# Altium PCB home_auto.PcbDoc
Units mil, origin at the board's own origin, x right, y up, seen from the top; angles counter-clockwise.
Board outline 3100 x 3100 mil, 4 copper layers (L1 SIG, L2 GND, L3 PW, L4 SIG), stack 35.156 mil thick; 40 components, 50 nets, 176 pads, 75 vias.
Unrouted connection lines stored in the file: 1.
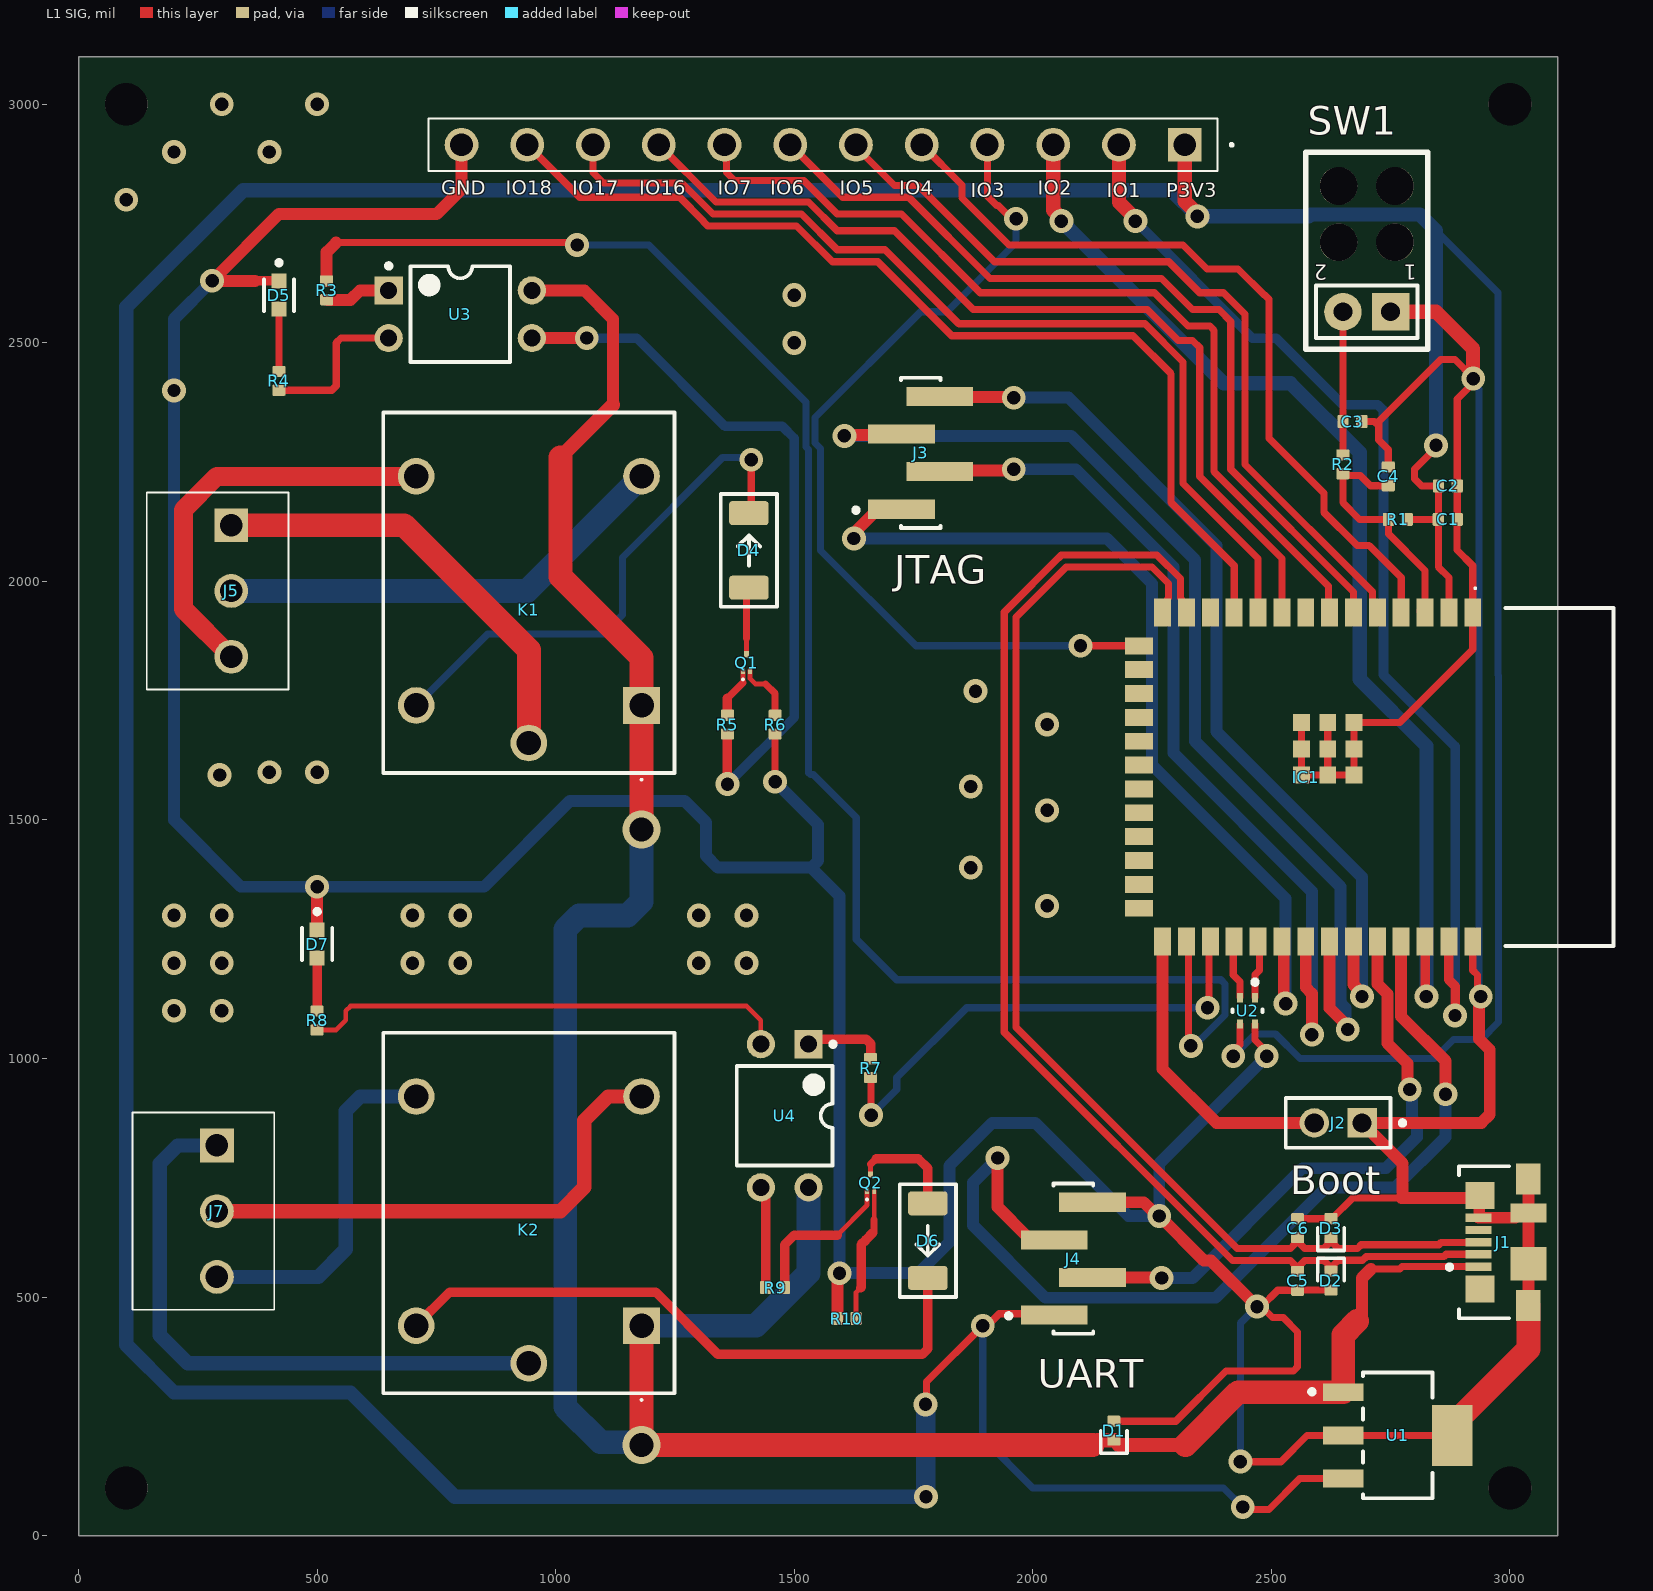
[diagram p0: L1 SIG view]
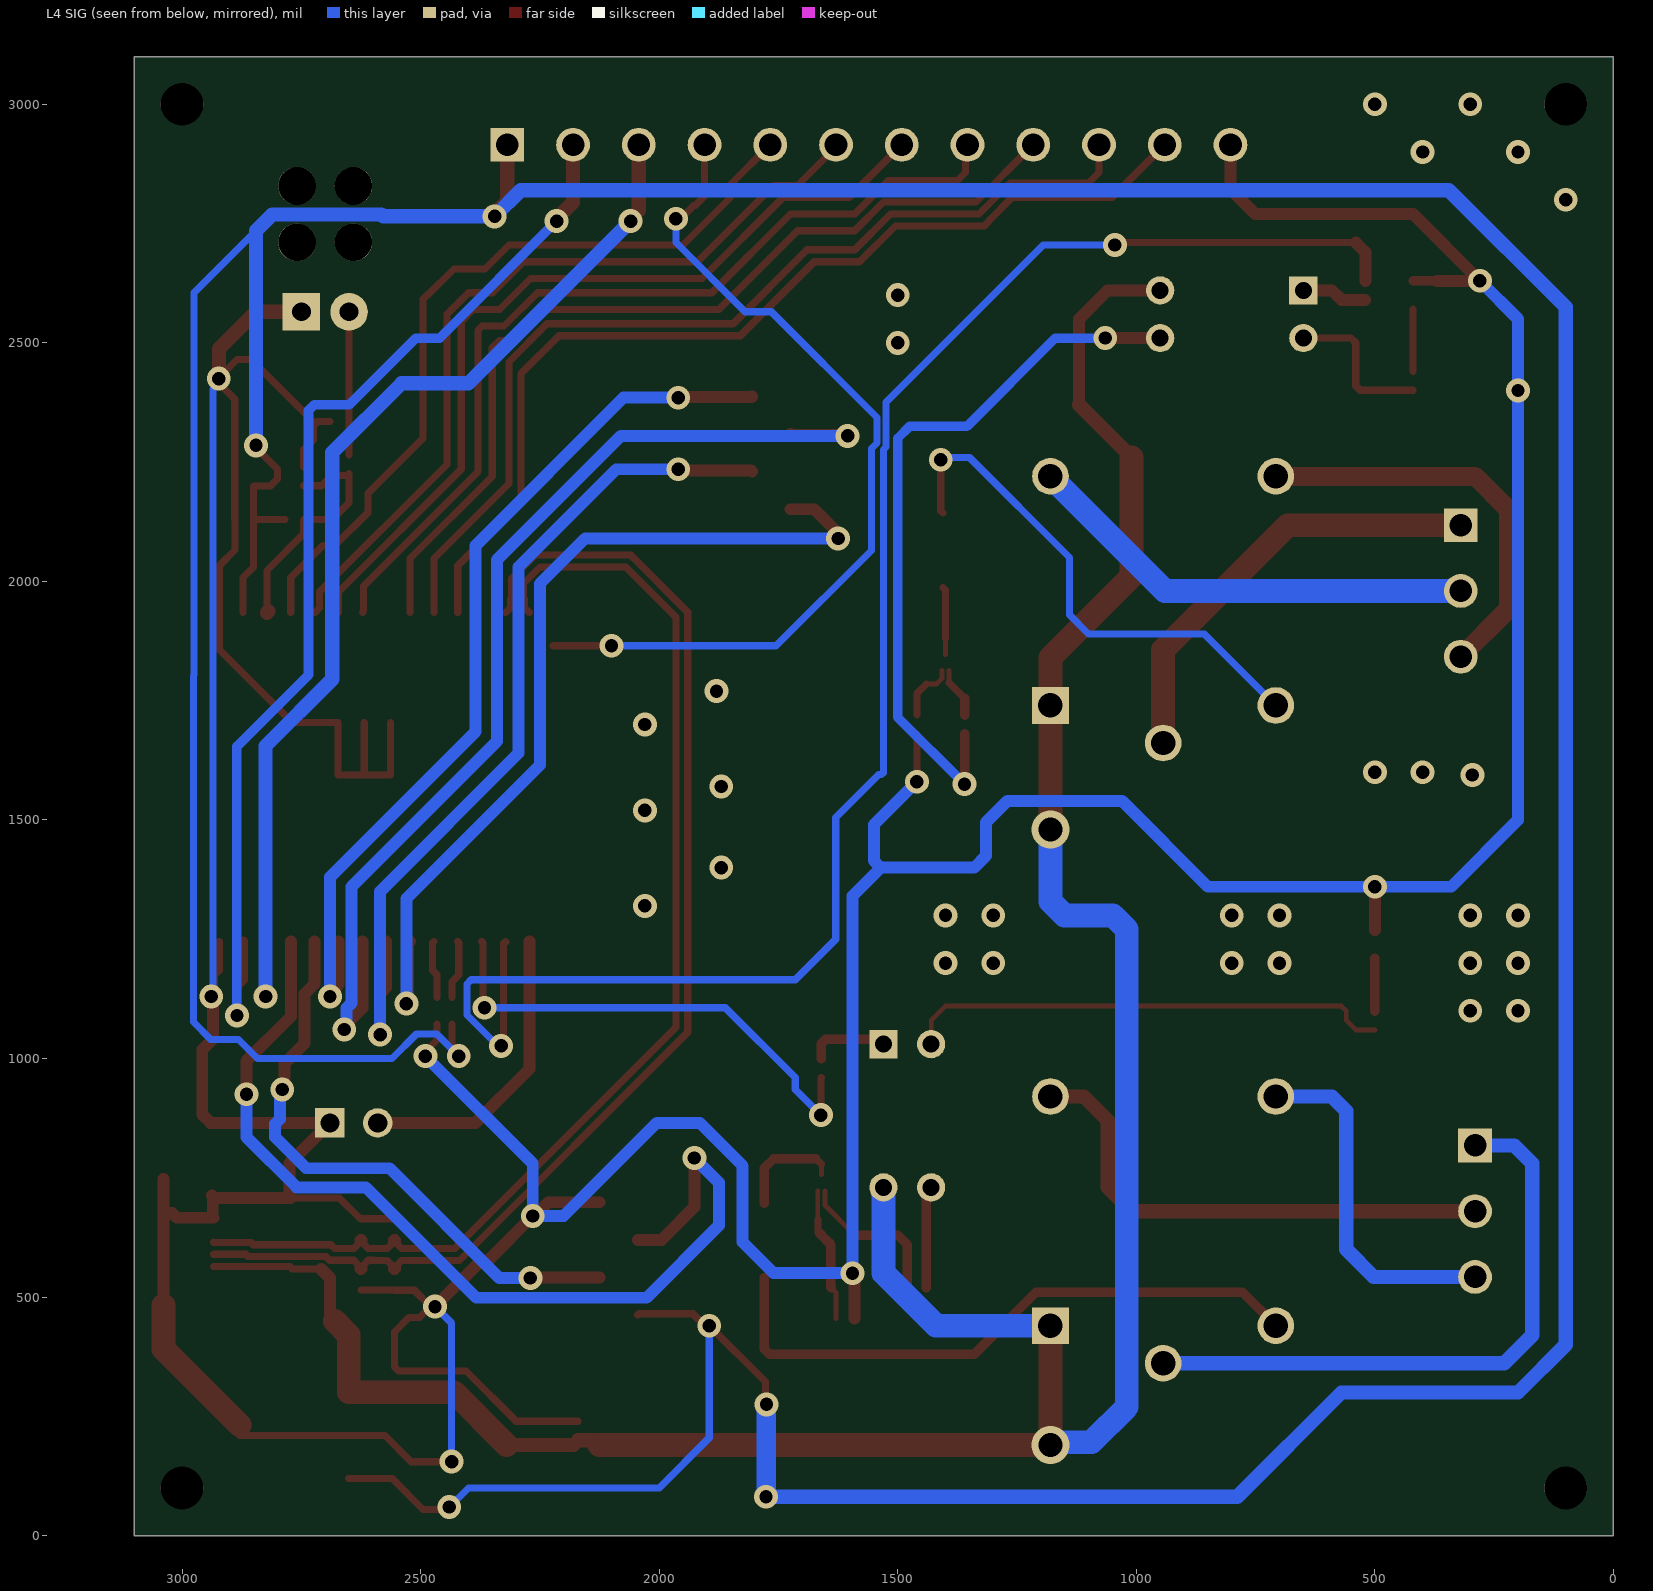
[diagram p1: L4 SIG view, seen from below]
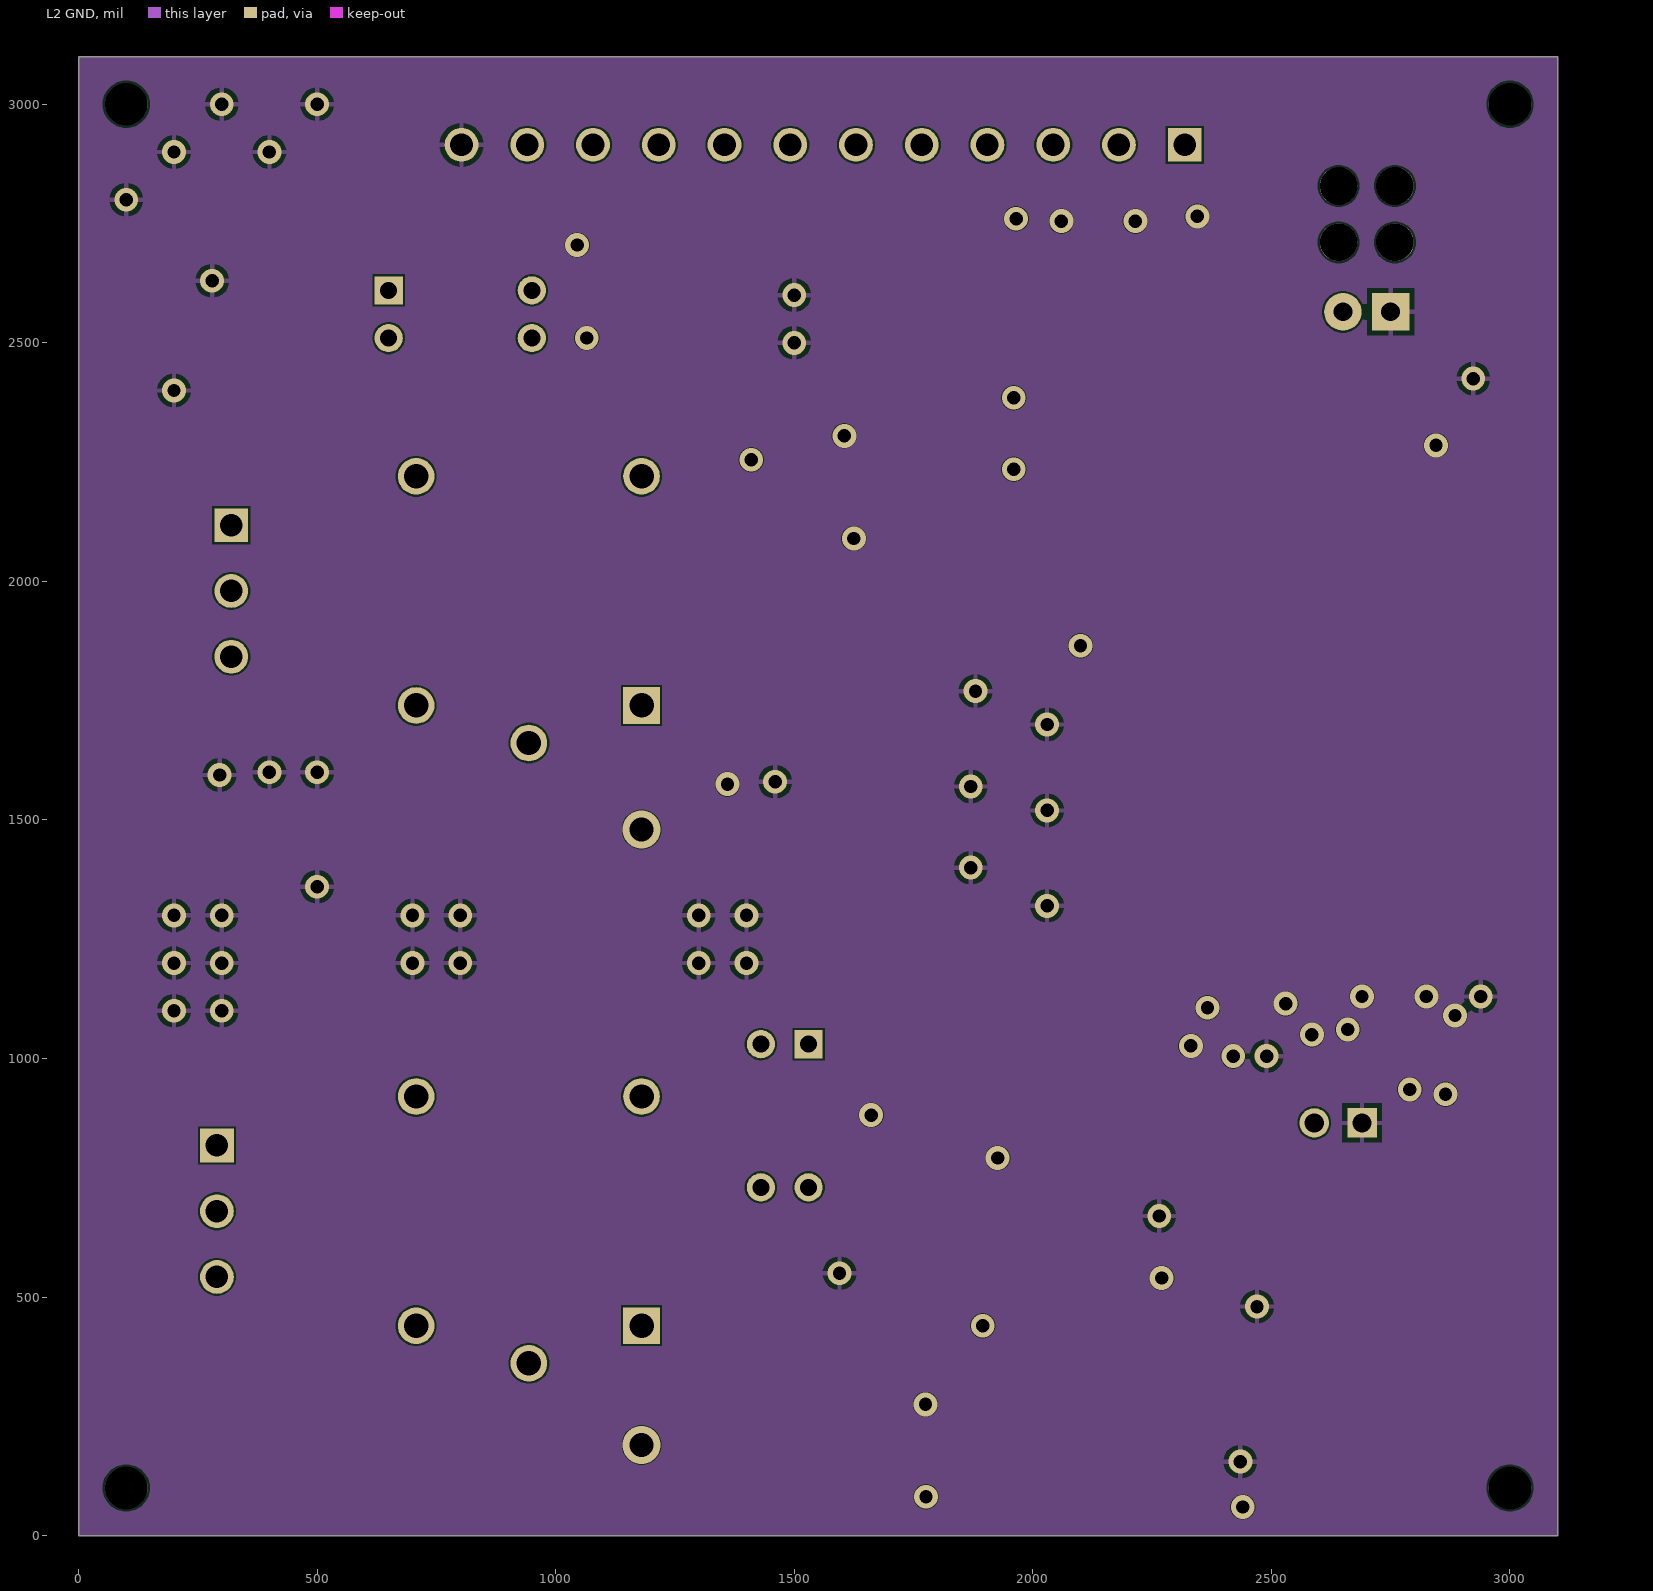
[diagram p2: L2 GND]
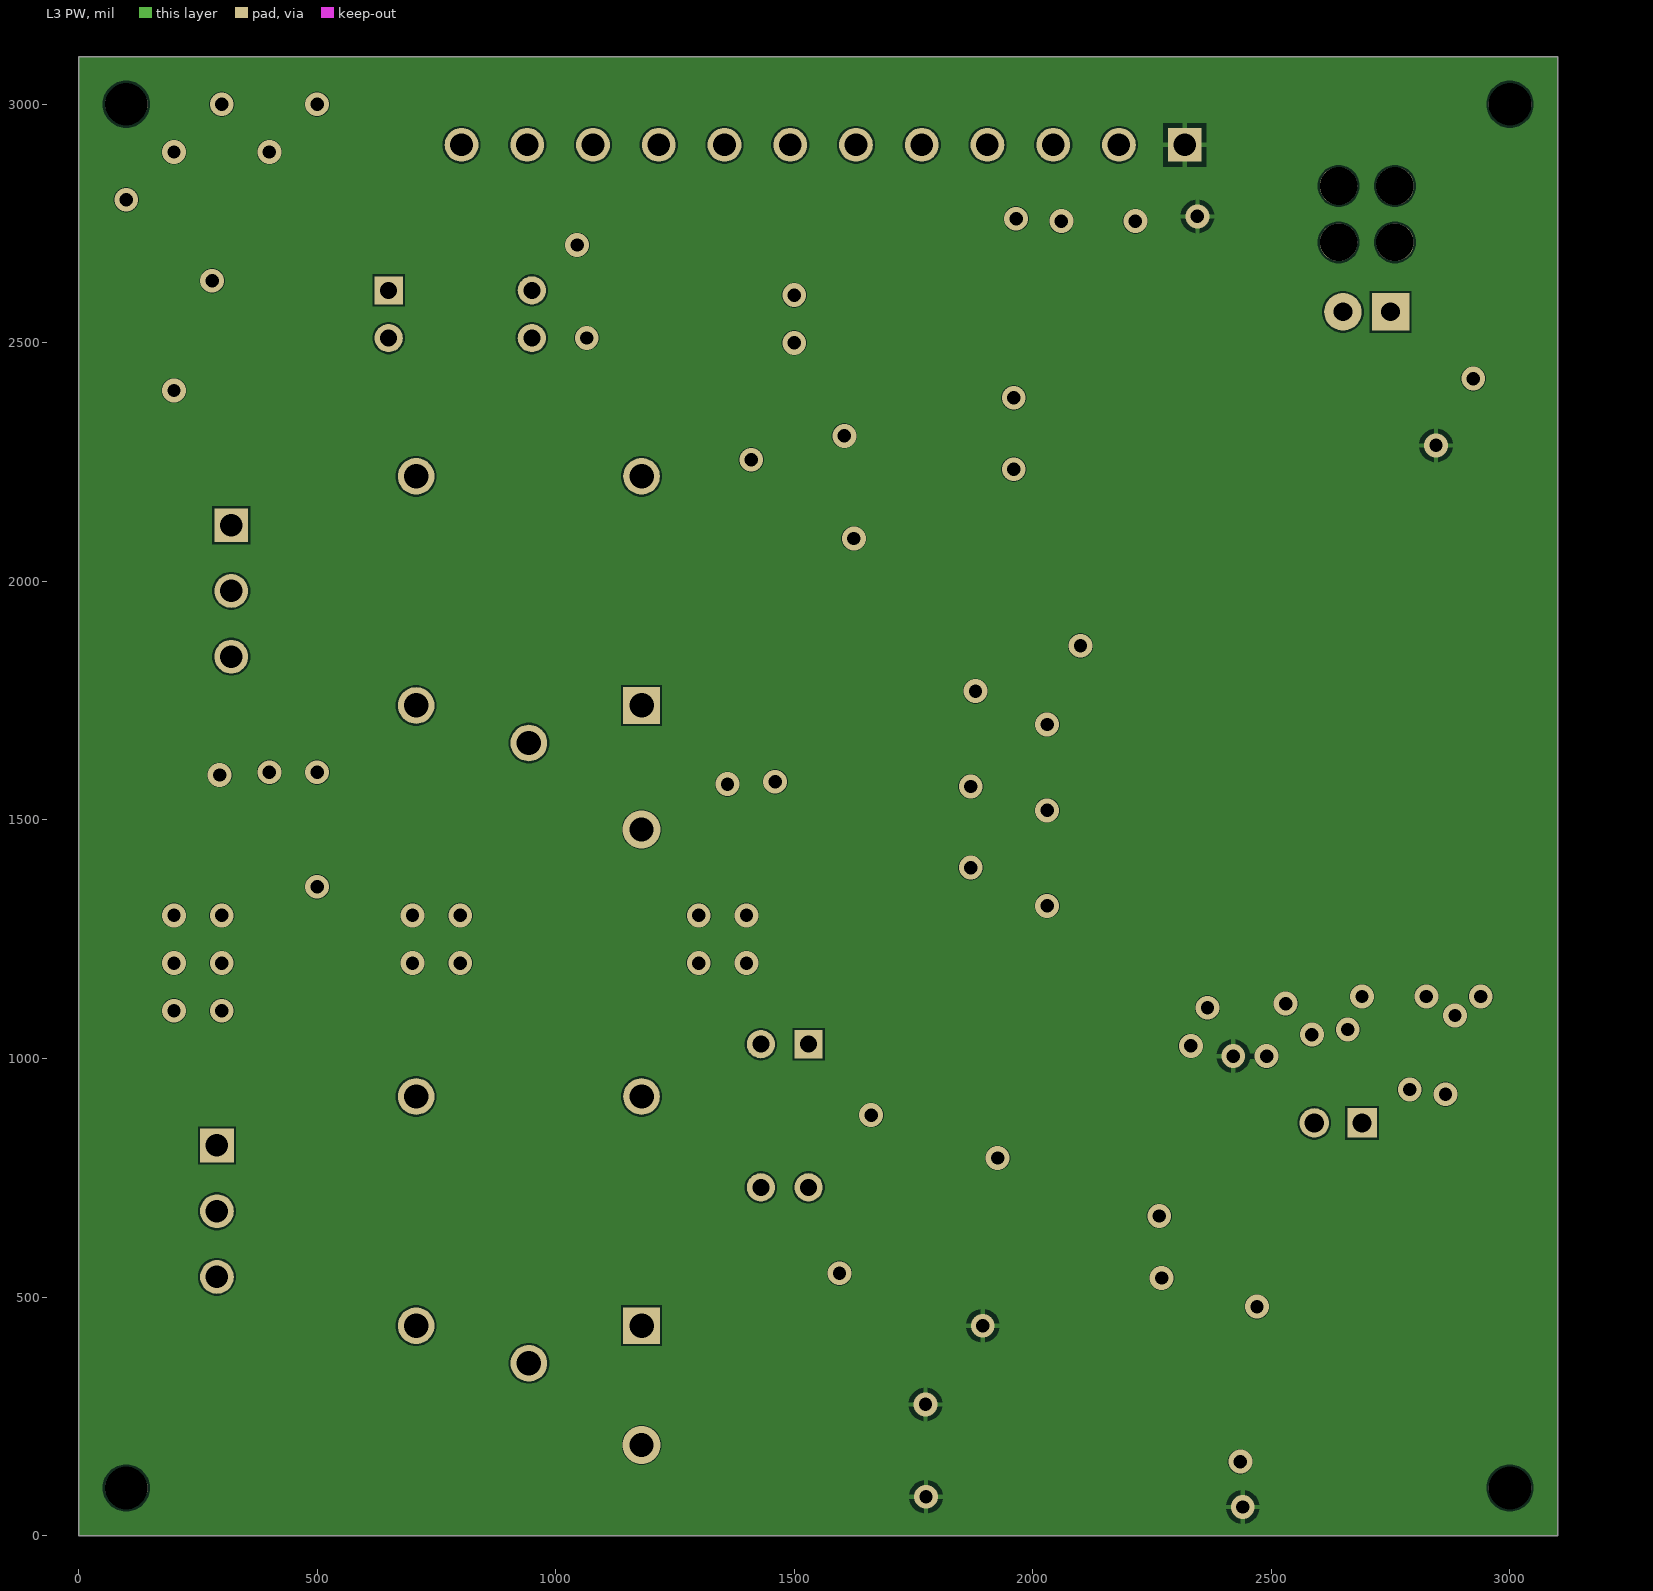
[diagram p3: L3 PW]
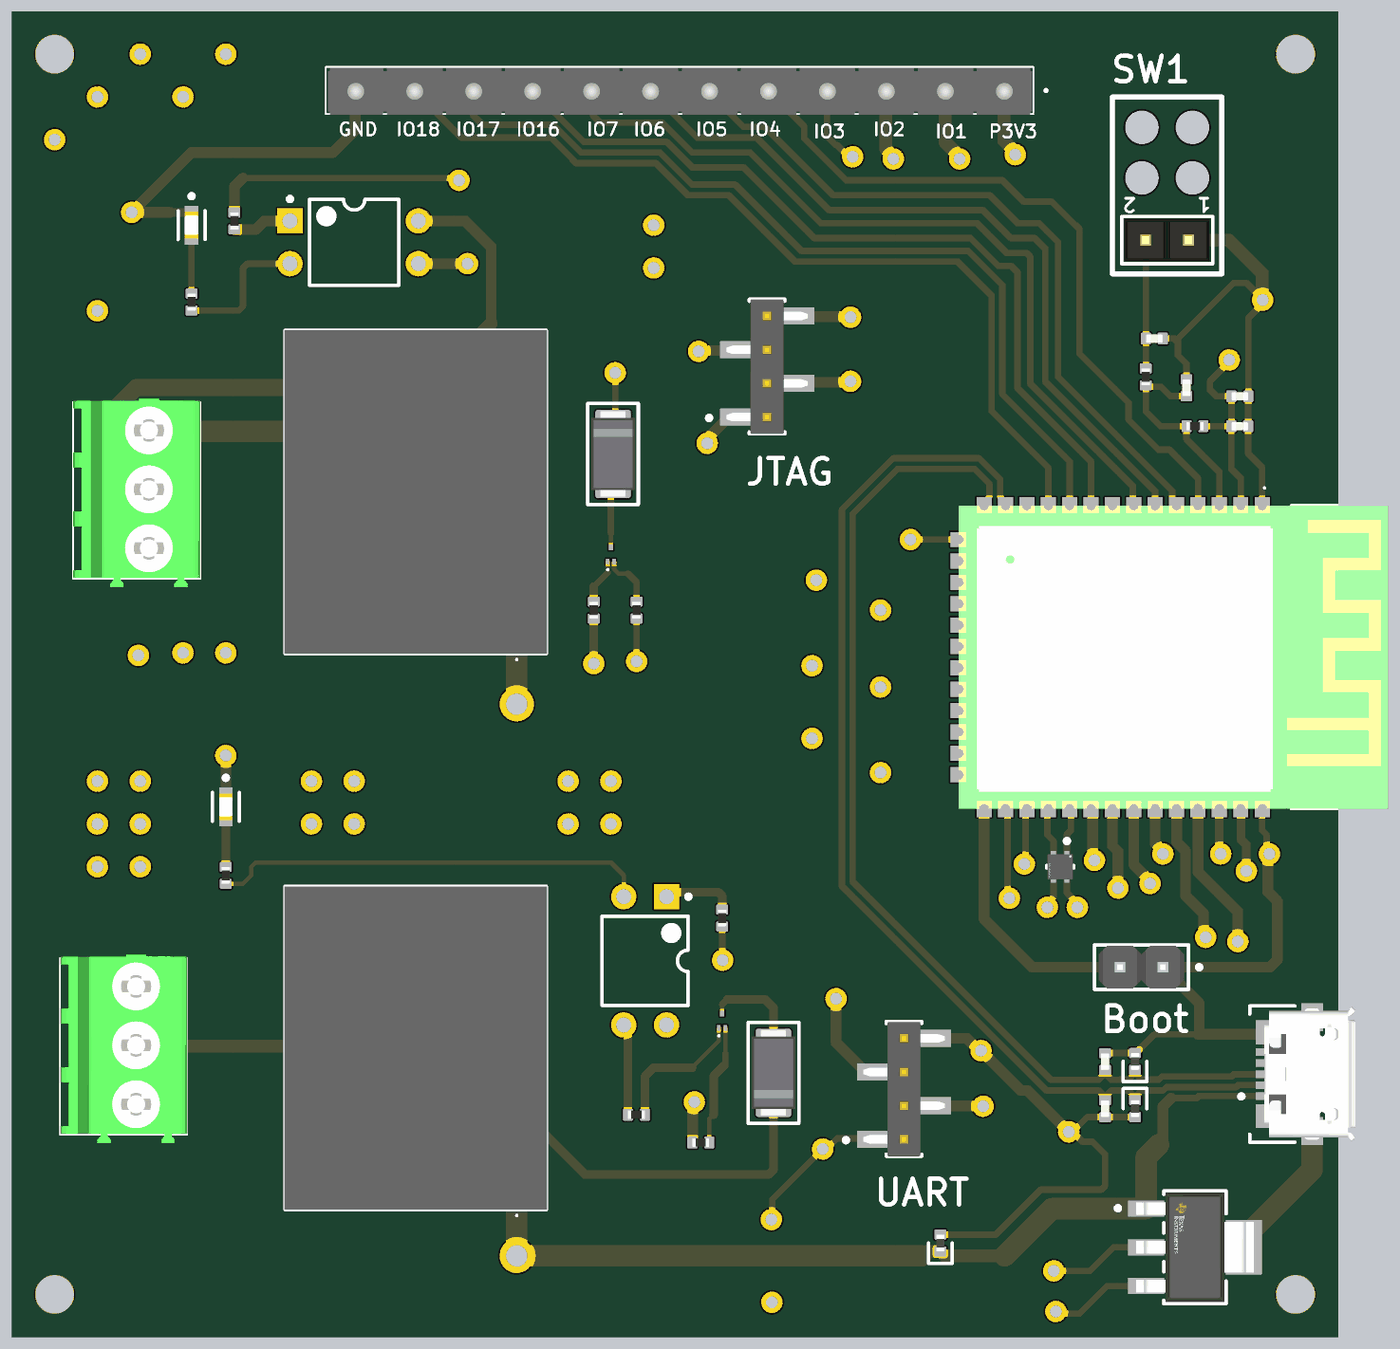
[diagram p4: 3D render of the assembled board from above, using the file's embedded part models]

## Layer stack, top to bottom
Top Solder: solder mask 0.4, Solder Resist, Dk 4
L1 SIG: signal copper 1.378
Dielectric 2: prepreg 2.8, PP-006, Dk 4.6
L2 GND: signal copper 1.4
Dielectric 1: core 24, Core-038, Dk 4.6
L3 PW: signal copper 1.4
Dielectric 3: prepreg 2.8, PP-006, Dk 4.6
L4 SIG: signal copper 1.378
Bottom Solder: solder mask 0.4, Solder Resist, Dk 4

## Board outline
0,0 0,3100 3100,3100 3100,0

## Design rules (kind name [scope] priority, off if disabled: settings)
Clearance [All] p1: gap=4 ignorepadtopadclearanceinfootprint=TRUE except(1: Via-Via Via-Fill Via-Poly Via-Region Via-Text Via-Hole)
DiffPairsRouting [InDifferentialPair('DATA')] p1: maxlimit=10 minlimit=10 mostfreqgap=10 toplayer_minwidth=15 toplayer_maxwidth=15 toplayer_prefwidth=15 midlayer1_minwidth=15 midlayer1_maxwidth=15 midlayer1_prefwidth=15 midlayer2_minwidth=15 midlayer2_maxwidth=15 midlayer2_prefwidth=15 bottomlayer_minwidth=15 bottomlayer_maxwidth=15 bottomlayer_prefwidth=15 maxuncoupledlength=500
PolygonConnect [All] p1: connectstyle=Relief reliefconductorwidth=10 reliefentries=4 polygonreliefangle="90 Angle" airgapwidth=10
RoutingVias [All] p1: holewidth=28 width=50 viastyle="Through Hole" minholewidth=5 minwidth=10 maxholewidth=30 maxwidth=80
SolderMaskExpansion [All] p1: expansion=4 istentingtop=FALSE
SupplyNets "Schematic Supply Nets_2" [InNet('VBUS')] p1: voltage=0.000
SupplyNets "Schematic Supply Nets_1" [InNet('GND')] p2: voltage=0.000
SupplyNets "Schematic Supply Nets" [InNet('P3V3')] p3: voltage=0.000
Width [All] p1: maxlimit=90 minlimit=10 preferedwidth=10
29 further rules are at their usual default settings.

## Classes and differential pairs
differential pair DATA: +DATA_P -DATA_N

## Components (designator, comment, footprint, x,y, rotation, side; value= is the part's Value field where it differs from the comment)
C1 "22u" CAP_0402 2869.69,2130 r180 top
C2 "1u" CAP_0402 2870,2200 r180 top
C3 "1u" CAP_0402 2670,2335 r0 top
C4 "1u" CAP_0402 2745,2220 r90 top
C5 "1u" CAP_0402 2555,534.06 r90 top
C6 "1u" CAP_0402 2555,644.37 r270 top
D1 "" D_0402 2170,220 r270 top
D2 "" D_0402 2625,534.37 r90 top
D3 "" D_0402 2625,644.69 r270 top
D4 "D_SMA" "DO-214AC-2 (SMA)" 1405,2065 r90 top
D5 "LTST-C193TBKT-5A" FP-LTST-C193TBKT-5A-MFG 420,2600 r270 top
D6 "D_SMA" "DO-214AC-2 (SMA)" 1780,618.15 r270 top
D7 "LTST-C193TBKT-5A" FP-LTST-C193TBKT-5A-MFG 500,1240 r270 top
IC1 "ESP32-S3-WROOM-1-N8" ESP32S3WROOM1N8R2 2715,1590 r270 top
J1 "473460001" FP-473460001-MFG 3025,615 r90 top
J2 "Boot" FP-M20-9990246-MFG 2640,865 r180 top
J3 "JTAG" FP-TMM-104-06-L-S-SM-MFG 1765,2269.37 r90 top
J4 "UART" FP-TMM-104-06-L-S-SM-MFG 2085,580.63 r90 top
J5 "1984620" 1984620 320,2117.8 r270 top
J6 "1945193" 1945193 2318.39,2915 r180 top
J7 "1984620" 1984620 290,817.8 r270 top
K1 "SRD-05VDC-SL-C" SRD05VDCSLC 1180,1740 r90 top
K2 "SRD-05VDC-SL-C" SRD05VDCSLC 1180,440 r90 top
Q1 "NST847BF3T5G" ONSC-SOT-1123-3-524AA_V 1400,1830 r90 top
Q2 "NST847BF3T5G" ONSC-SOT-1123-3-524AA_V 1660,740 r90 top
R1 "10K" RES_0402 2765,2130 r180 top
R2 "10K" RES_0402 2650,2245.32 r270 top
R3 "1K" RES_0402 520,2610 r270 top
R4 "R0402" RES_0402 420,2420.32 r270 top
R5 "2K2" RES_0402 1360,1700 r90 top
R6 "1K" RES_0402 1460,1700 r90 top
R7 "1K" RES_0402 1660,980 r90 top
R8 "R0402" RES_0402 500,1079.69 r270 top
R9 "2K2" RES_0402 1459.68,520 r0 top
R10 "1K" RES_0402 1610,455 r0 top
SW1 "FOOTSWITCH_MOM" FOOTSWITCH_MOM 2700,2565 r180 top
U1 "LM3940IMPX-3.3/NOPB" FP-DCY0004A-MFG 2765,210 r0 top
U2 "SHT45-AD1B-R2" FP-SHT45-AD1B-R2-MFG 2450,1100 r270 top
U3 "LTV-817" LTST-LTV-817-4 800,2560 r0 top
U4 "LTV-817" LTST-LTV-817-4 1480,880 r270 top

## Footprints (in the part's own frame and the unit in brackets; to place one, negate y for a bottom-side part, rotate by r counter-clockwise, add the part's x,y. Pads: shape width x height; smd on the part's side, far side on the other; paste and mask are expansions set on the pad)
1945193 [mm]
  rect 1.8x1.8 hole 1.2: 1(0,0)
  round 1.8 hole 1.2: 2(3.5,0) 3(7,0) 4(10.5,0) 5(14,0) 6(17.5,0) 7(21,0) 8(24.5,0) 9(28,0) 10(31.5,0) 11(35,0) 12(38.5,0)
  silkscreen extent -2.55,-1.4 40.25,1.4, body extent -1.68,-1.35 40.12,1.45, height 9.56
1984620 [mm]
  rect 1.8x1.8 hole 1.2: 1(0,0)
  round 1.8 hole 1.2: 2(3.5,0) 3(7,0)
  silkscreen extent -1.75,-4.5 8.75,3.05, body extent -1.94,-4.49 9.26,3.06, height 9.15
CAP_0402 [mm]
  rrect25% 0.6x0.7 smd: 1(-0.5,0) 2(0.5,0)
  body extent -0.5,-0.26 0.5,0.26, height 0.37
D_0402 [mm]
  rrect25% 0.6x0.7 smd: A(-0.5,0) K(0.5,0)
  silkscreen extent 0,-0.7 1.2,0.7, body extent -0.5,-0.25 0.5,0.25, height 0.51
"DO-214AC-2 (SMA)" [mm]
  rrect25% 1.27x2.1 smd: A(-1.985,0) K(1.985,0)
  silkscreen extent -3,-1.5 3,1.5, body extent -2.6,-1.3 2.6,1.3, height 2.42
ESP32S3WROOM1N8R2 [mm]
  rect 1.5x0.9 smd: 1(-8.75,5.26) 2(-8.75,3.99) 3(-8.75,2.72) 4(-8.75,1.45) 5(-8.75,0.18) 6(-8.75,-1.09) 7(-8.75,-2.36) 8(-8.75,-3.63) 9(-8.75,-4.9) 10(-8.75,-6.17) 11(-8.75,-7.44) 12(-8.75,-8.71) 13(-8.75,-9.98) 14(-8.75,-11.25) 27(8.75,-11.25) 28(8.75,-9.98) 29(8.75,-8.71) 30(8.75,-7.44) 31(8.75,-6.17) 32(8.75,-4.9) 33(8.75,-3.63) 34(8.75,-2.36) 35(8.75,-1.09) 36(8.75,0.18) 37(8.75,1.45) 38(8.75,2.72) 39(8.75,3.99) 40(8.75,5.26)
  rect 0.9x1.5 smd: 15(-6.985,-12.5) 16(-5.715,-12.5) 17(-4.445,-12.5) 18(-3.175,-12.5) 19(-1.905,-12.5) 20(-0.635,-12.5) 21(0.635,-12.5) 22(1.905,-12.5) 23(3.175,-12.5) 24(4.445,-12.5) 25(5.715,-12.5) 26(6.985,-12.5)
  rect 0.9x0.9 smd: 41(-1.5,-2.46) 42(-1.5,-1.06) 43(-2.9,-1.06) 44(-2.9,-2.46) 45(-2.9,-3.86) 46(-1.5,-3.86) 47(-0.1,-3.86) 48(-0.1,-2.46) 49(-0.1,-1.06)
  silkscreen extent -10.1,5.35 9,12.75, body extent -9,-12.75 9,12.75, height 2.7
FOOTSWITCH_MOM [mm]
  rect 2x2 hole 1 mask+0.1: 1(-1.27,0)
  round 2 hole 1 mask+0.1: 2(1.27,0)
  round 2 hole 2 unplated mask+0.1: SR(-1.5,-3.7) SR(-1.5,-6.7) SR(1.5,-3.7) SR(1.5,-6.7)
  silkscreen extent -3.25,-8.5 3.25,2, body extent -2.53,-1.27 2.55,1.27, height 8.44
FP-473460001-MFG [mm]
  rect 0.45x1.38 smd paste+0 mask+0: 1(-1.3,2.31) 2(-0.65,2.31) 3(0,2.31) 4(0.65,2.31) 5(1.3,2.31)
  rect 1.425x1.55 smd paste+0 mask+0: 6(-2.488,2.225) 7(2.488,2.225)
  rect 1.65x1.3 smd paste+0 mask+0: 8(-3.375,-0.35) 11(3.375,-0.35)
  rect 1.8x1.9 smd paste+0 mask+0: 9(-1.15,-0.35)
  rect 1x1.9 smd paste+0 mask+0: 10(1.55,-0.35)
  silkscreen extent -4.05,0.67 4.05,3.97, body extent -4.3,-2.48 4.3,3.45, height 0.25
FP-DCY0004A-MFG [mm]
  rect 2.15x0.95 smd paste+0 mask+0: 1(-2.9,2.3) 2(-2.9,0) 3(-2.9,-2.3)
  rect 2.15x3.25 smd paste+0 mask+0: 4(2.9,0)
  silkscreen extent -4.7,-3.35 1.85,3.35, body extent -4.08,-3.45 4.08,3.45, height 0.25
FP-LTST-C193TBKT-5A-MFG [mm]
  rect 0.8x0.8 smd paste+0 mask+0: 1(-0.75,0) 2(0.75,0)
  silkscreen extent -1.85,-0.8 0.85,0.8, body extent -1.25,-0.55 1.25,0.55, height 0.25
FP-M20-9990246-MFG [mm]
  rect 1.57x1.57 hole 1.02 paste-2539.97 mask+0: 1(-1.27,0)
  round 1.57 hole 1.02 paste-2539.97 mask+0: 2(1.27,0)
  silkscreen extent -3.55,-1.32 2.79,1.32, body extent -2.89,-1.42 2.89,1.42, height 0.25
FP-SHT45-AD1B-R2-MFG [mm]
  rect 0.5x0.3 smd paste+0 mask+0: 1(-0.7,0.4) 2(-0.7,-0.4) 3(0.7,-0.4) 4(0.7,0.4)
  silkscreen extent -1.65,-0.8 0.08,0.8, body extent -1.05,-0.9 1.05,0.9, height 0.25
FP-TMM-104-06-L-S-SM-MFG [mil]
  rect 40x140 smd paste+0 mask+0: 1(-118.11,40) 2(-39.37,-40) 3(39.37,40) 4(118.11,-40)
  silkscreen extent -157,-42 157,140, body extent -161,-114 161,114, height 10
LTST-LTV-817-4 [mm] "DIP, 4-Leads, Body 7x5.1mm, Pitch 2.54mm"
  rect 1.5x1.5 hole 0.9: 1(-3.81,1.27)
  round 1.5 hole 0.9: 2(-3.81,-1.27) 3(3.81,-1.27) 4(3.81,1.27)
  silkscreen extent -3.93,-2.55 2.65,2.69, body extent -3.95,-2.55 3.95,2.55, height 4.5
ONSC-SOT-1123-3-524AA_V [mm] "SOT223, 3-Leads, Body 0.8x0.6mm, Pitch 0.38mm"
  rect 0.34x0.2 smd: 1(-0.43,0.19) 2(-0.43,-0.19)
  rect 0.34x0.26 smd: 3(0.43,0)
  silkscreen extent -0.95,0.14 -0.85,0.24, body extent -0.4,-0.3 0.4,0.3, height 0.4
RES_0402 [mm]
  rrect25% 0.6x0.7 smd: 1(-0.5,0) 2(0.5,0)
  body extent -0.5,-0.25 0.5,0.25, height 0.3
SRD05VDCSLC [mm]
  rect 1.95x1.95 hole 1.3: 1(0,0)
  round 1.95 hole 1.3: 2(12.2,0) 3(12.2,12) 4(0,12) 5(-2,6)
  silkscreen extent -4,-1.75 15.6,13.75, body extent -3.6,-1.8 15.6,13.8, height 15.9

## Part data
C1 C2 C3 C4 C5 C6: library part CAP_0402, "Capacitor SMD 0402"
D1 D2 D3: library part D_TVS_0402, "Diode TVS / ESD 0402"
D4 D6: "Diode SMD SMA (DO-214AA)"
D5 D7: library part CMP-2000-06624-2, "LED BLUE CLEAR CHIP SMD", Case Code (Imperial)=0603, Case Code (Metric)=1608, Color=Blue, Forward Current=20mA, Forward Voltage=2.8V, Lens Color=Colorless, Max Operating Temperature=80°C, Min Operating Temperature=-20°C, Package Quantity=1, Power Dissipation=76mW, Reverse Voltage=5V, Test Current=5mA, Case/Package=0603, Depth=0.8mm, Dominant Wavelength=475nm, Height=0.35mm, Illumination Color=Blue, Lead Free="Lead Free", Length=1.6mm, Lens Style=Diffused, Lens Transparency=Clear, Luminous Intensity=15mcd, Mount="Surface Mount", Number of Elements=1, Number of LEDs=1, Number of Pins=2, Packaging="Tape and Reel", Radiation Hardening=No, RoHS Compliant=Yes, Viewing Angle=130°, Width=0.8mm
IC1: "Integrated Circuit", Manufacturer_Name="Espressif Systems", Mouser Part Number=356-ESP32-S3WROOM1N8, Datasheet Link=https://www.espressif.com/sites/default/files/documentation/esp32-s3-wroom-1_wroom-1u_datasheet_en.pdf, Height=3.25mm, Manufacturer_Part_Number=ESP32-S3-WROOM-1-N8, Mouser Price/Stock=https://www.mouser.co.uk/ProductDetail/Espressif-Systems/ESP32-S3-WROOM-1-N8?qs=Wj%2FVkw3K%252BMC1mq0KGPvoSQ%3D%3D
J1: library part CMP-2000-05246-2, "CONN RCPT USB2.0 MICRO B SMD R/A", Current Rating=1.8A, Manufacturer=Molex, Package=0, Temperature="-30°C to +85°C", Temperature Range High=+85°C, Temperature Range Low=-30°C, Voltage Rating=30V, Automotive=No, Category=Conn, ComponentLink2Description=Datasheet, ComponentLink2URL=https://www.molex.com/webdocs/datasheets/pdf/en-us/0473460001_IO_CONNECTORS.pdf, Conn Orientation="Right Angle", Contact Material=Gold,Nickel, Device Class L1=Connectors, Device Class L2="USB Connectors", Device Class L3=unset, Digikey Description="CONN RCPT USB2.0 MICRO B SMD R/A", Footprint Url=https://www.molex.com/pdm_docs/sd/473460001_sd.pdf, Height=2.945mm, Is Female=yes, Lead Free=Yes, Manufacturer Part Number=473460001, Number of Contacts=5, Octopart=https://octopart.com/47346-0001-molex-7164928, Pitch=0.65mm, RoHS=TRUE, Shielding=true, USB Standard="USB 2.0"
J2: library part CMP-15831-000009-1, "CONN HEADER VERT 2POS 2.54MM", Current Rating=3A, Manufacturer=Harwin, Manufacturer Part Number=M20-9990246, Temperature="-40°C to +105°C", Temperature Range High=+105°C, Temperature Range Low=-40°C, Automotive=No, Category=Conn, ComponentLink2Description=Datasheet, ComponentLink2URL=https://cdn.harwin.com/pdfs/M20-999.pdf, Conn Gender=Male, Conn Orientation=Vertical, Contact Material=Tin,Nickel, Device Class L1=Connectors, Device Class L2="Headers and Wire Housings", Device Class L3=unset, Digikey Description="CONN HEADER VERT 2POS 2.54MM", Height=8.99mm, Lead Free=Yes, Mouser Description="2.54mm (0.1\") Pitch SIL Vertical PC Tail Pin Header, 6.1mm mating pin height, tin, 2 contacts", Number of Contacts=2, Number Of Rows=1, Octopart=https://octopart.com/m20-9990246-harwin-2590635, Package=M20-9990246, Pitch=2.54mm, RoHS=TRUE
J3 J4: library part CMP-02766-001580-1, "2MM TERMINAL STRIP", Flammability Rating="UL94 V-0", Housing Color=Black, Max Current Rating=3.9A, Max Operating Temperature=125°C, Max Voltage Rating (AC)=500V, Min Operating Temperature=-55°C, Connector Type=Header, Contact Finish - Mating=GOLD, Contact Material=Bronze, Contact Plating=Gold, Contact Shape=Square, Contact Type="Male Pin", Depth=1.97mm, Fastening Type=Pull, Gender=Male, Housing Material=Polymer, Insulation Color=Black, Insulation Material=Polymer, Lead Free="Lead Free", Length=8mm, Number of Contacts=4, Number of Positions=4, Number Of Rows=1, Orientation=Straight, Packaging=Rail/Tube, Pitch=2mm, Radiation Hardening=No, RoHS Compliant=Yes, Series=TMM, Termination=Solder
J5 J7: "Connector", Manufacturer_Name="Phoenix Contact", Mouser Part Number=651-1984620, Arrow Part Number=1984620, Arrow Price/Stock=https://www.arrow.com/en/products/1984620/phoenix-contact?utm_currency=USD&region=nac, Datasheet Link=https://datasheet.datasheetarchive.com/originals/distributors/SFDatasheet-2/sf-00059019.pdf, Height=9.3mm, Manufacturer_Part_Number=1984620, Mouser Price/Stock=https://www.mouser.co.uk/ProductDetail/Phoenix-Contact/1984620?qs=qPbxTIUfeZanCGLWbKOtjg%3D%3D
J6: "Connector", Manufacturer_Name="Phoenix Contact", Mouser Part Number=651-1945193, Arrow Part Number=1945193, Arrow Price/Stock=https://www.arrow.com/en/products/1945193/phoenix-contact?region=nac, Datasheet Link=http://www.phoenixcontact.com/de/produkte/1945193/pdf, Height=9.2mm, Manufacturer_Part_Number=1945193, Mouser Price/Stock=https://www.mouser.co.uk/ProductDetail/Phoenix-Contact/1945193?qs=BYlwlsDsB%2Fqar1yaPw8fZg%3D%3D
K1 K2: "Relay or Contactor", Manufacturer_Name=EAGLE, Datasheet Link=http://www.songlerelay.com/Public/Uploads/20161104/581c81ac16e36.pdf, Height=15.8mm, Manufacturer_Part_Number=SRD-05VDC-SL-C
Q1 Q2: library part CMP-1048-00443-1, "NPN General Purpose Transistor, 3-Pin SOT-1123, Pb-Free, Tape and Reel", Manufacturer="On Semiconductor", ComponentLink1Description="Manufacturer URL", ComponentLink1URL=http://www.onsemi.com/, ComponentLink2Description=Datasheet, ComponentLink2URL=http://www.onsemi.com/pub_link/Collateral/NST847BF3-D.PDF, ComponentLink3Description="Package Specification", ComponentLink3URL=http://www.onsemi.cn/pub_link/Collateral/524AA.PDF, DatasheetVersion="Rev. 1", fT Min (MHz)=100, IC Continuous (A)=0.1, Mounting Technology="Surface Mount", PackageDescription="3-Pin Small Outline Transistor, Body 0.8 x 0.6 mm, Pitch 0.375 mm", PackageReference=SOT-1123-3-524AA, PackageVersion="Rev. C, 11/2011", Packing="Tape and Reel", PartNumber=NST847BF3T5G, Polarity=NPN, RoHS=TRUE
R1 R2 R3 R4 R5 R6 R7 R8 R9 R10: library part RES_0402, "Resistor SMD 0402"
SW1: "Header 2.54mm THT for Momentary SPST Footswitch"
U1: library part CMP-04917-000180-1, "IC REG LINEAR 3.3V 1A SOT223-4", Case/Package=SOT-223, Dropout Voltage=500mV, Max Input Voltage=7.5V, Max Operating Temperature=125°C, Max Output Current=1A, Min Input Voltage=4.5V, Min Operating Temperature=-40°C, Output Voltage=3.3V, Package Quantity=2000, Quiescent Current=15mA, Contact Plating=Tin, Lead Free="Lead Free", Mount="Surface Mount", Number of Outputs=1, Number of Pins=4, Number of Regulators=1, Output Current=1A, Output Type=Fixed, Packaging="Tape and Reel", Polarity=Positive, Radiation Hardening=No, RoHS Compliant=Yes
U2: library part CMP-144040-000011-1, "SENSOR HUMID/TEMP HIGH ACCURACY"
U3 U4: library part CMP-2000-06632-1, "Photocoupuler, 50 mA Forward Current, 1.2 V Forward Voltage, -50 to 110 degC, 4-Pin DIP, RoHS, Tube", Manufacturer=Lite-On, Maximum Collector Current=50mA, Maximum Collector Emitter Saturation Voltage=200mV, Maximum Collector Emitter Voltage=35V, Maximum Current Transfer Ratio=600%, Maximum Forward Voltage=1.4V, Maximum Operating Temperature=100C, Maximum Power Dissipation=200mW, Maximum Reverse Voltage=6V, Minimum Current Transfer Ratio=50%, Minimum Isolation Voltage=5000Vrms, Minimum Operating Temperature=-30C, Package Description="4-Pin Double In-line Package, Body 6.5 x 4.6 mm, Pitch 2.54 mm", Supplier_Package=PDIP, Typical Forward Voltage=1.2V, Datasheet URL=http://optoelectronics.liteon.com/upload/download/DS70-2012-0050/S_110_LTV-8X7%20series%200915.pdf, Datasheet Version="Rev. E, 10/2015", Family=LTV817, Input Type=DC, Manufacturer URL=http://www.us.liteon.com/, Maximum Fall Time=18us, Maximum Input Current=50mA, Maximum Rise Time=18us, Mounting=ThroughHole, Mounting Technology=ThroughHole, Number of Channels per Chip=1, Output Device=Transistor, Output Type=DC, Package Reference=LTV-817, Pin_Count=4, Product Height=3.5mm, Product Length=4.6mm, Product Type=TransistorandPhotovoltaicOutputPhotoCouplers, Product Width=6.5mm, Typical Fall Time=3us, Typical Rise Time=4us

## Free pads (board coordinates)
  oval 90x60 hole 90: 2(100,100) 2(100,3000) 2(3000,100) 2(3000,3000)

## Via types
v1: diameter 50, hole 28, L1 SIG to L4 SIG, 73 vias
v2: diameter 80, hole 50, L1 SIG to L4 SIG, 2 vias

## Nets (pads, with @x,y where several pads share a name; then routed paths per layer and width w, separated by ;. In a path a pad name is that pad's centre, name@x,y a point inside that pad or via, vN(x,y) a via of type N, cw(c..) or ccw(c..) an arc to the next point about the centre after c; other vN are vias at no path point)
COM1: J5.1 K1.5 | length 927.1
  L1 SIG w50: J5.1 682.2,2117.8 943.78,1856.22 K1.5
COM2: J7.1 K2.5 | length 1293.8
  L4 SIG w30: J7.1 207.8,817.8 170,780 170,420 228.74,361.26 K2.5
DATA_N: C5.2 D2.K IC1.13 J1.2 | length 2655.2
  L1 SIG w15: IC1.13 2311.87,1944.7 2311.87,1963.02 2309.59,1965.3 2309.59,2005.77 2260.36,2055 2059.64,2055 2045,2040.36 1954.64,1950 1940,1935.36 1940,1055 1954.64,1040.36 2403.64,591.36 2418.29,576.71 2539.93,576.71 2548.72,567.93 2548.72,558.05 2553.03,553.74 C5.2 2556.97,553.74 2561.28,558.05 2561.28,567.93 2570.07,576.71 2597.19,576.71 2597.51,577.03 2609.93,577.03 2618.72,568.24 2618.72,558.37 2623.03,554.06 D2.K 2626.97,554.06 2631.28,558.37 2631.28,568.24 2640.07,577.03 2691.04,577.03 2698.72,584.7 2861.26,584.7 2866.26,589.7 2933.76,589.7 J1.2
DATA_P: C6.2 D3.K IC1.14 J1.3 | length 2531
  L1 SIG w15: IC1.14 2282.3,1944.7 2282.3,1963.02 2284.59,1965.3 2284.59,1995.41 2250,2030 2070,2030 1965,1925 1965,1065.36 2428.64,601.71 2539.93,601.71 2548.72,610.5 2548.72,620.37 2553.03,624.68 C6.2 2556.97,624.68 2561.28,620.37 2561.28,610.5 2570.07,601.71 2586.84,601.71 2587.15,602.03 2609.93,602.03 2618.72,610.81 2618.72,620.69 2623.03,625 D3.K 2626.97,625 2631.28,620.69 2631.28,610.81 2640.07,602.03 2680.69,602.03 2688.37,609.7 2850.9,609.7 2855.9,614.7 2933.76,614.7 J1.3
GND: C1.1 C2.1 C3.2 C4.2 C5.1 C6.1 D1.A D2.A D3.A D5.1 D7.1 IC1.1 IC1.40 IC1.41 IC1.42 IC1.43 IC1.44 IC1.45 IC1.46 IC1.47 IC1.48 IC1.49 J1.5 J1.6 J1.7 J1.8 J1.9 J1.10 J1.11 J2.1 J4.4 J6.12 R6.1 R10.1 SW1.1 U1.2 U1.4 U2.4 | length 13774.9
  L1 SIG w10: D5.1@419.53,2630 D5.1
  L1 SIG w15: v1(1460,1580) R6.1 ; D1.A 2299.68,239.68 2405,345 2546.21,345 2555,353.79 2555,426.97 2524.88,457.09 2502.38,457.09 v1@2479.47,480 ; v1(2435,155) 2520,155 2575,210 U1.2 U1.4 U1.4@2879.17,231.65 ; U2.4 2465.75,1038.72 2490,1014.47 v1(2490,1005) ; v1@2479.04,480 2513.41,514.37 C5.1 2555.16,514.53 2624.84,514.53 D2.A ; C6.1 2555.16,664.21 2624.84,664.21 D3.A 2626.97,664.37 2670.53,707.93 2772.4,707.93 ; IC1.45 IC1.46 IC1.47 IC1.48 ; IC1.44 IC1.41 IC1.48 ; C3.2 2716.21,2335 2720.61,2330.61 ; C4.2 2745,2276.36 2725,2296.36 2725,2335 2855,2465 2885,2465 2923.29,2426.71 v1(2923.29,2425) ; IC1.40 2922.09,1185 2932.3,1174.78 2932.3,1136.7 v1(2939,1130) ; v1@2924.15,2425.85 2924.15,2417 2889.68,2382.53 C2.1 2889.53,2199.84 2889.53,2130.16 C1.1 2889.37,2065.63 2922.09,2032.91 IC1.1 2922.09,1857.09 2769.17,1704.17 IC1.43 IC1.42 IC1.49 IC1.48
  L1 SIG w20: 370,2630 D5.1@419.53,2630
  L1 SIG w25: 370,2630 v1(280,2630) 420,2770 750.36,2770 802.64,2822.28 J6.12 ; D7.1 v1(500,1360) ; R10.1 1591,455.69 1591,546 v1(1595,550) ; J4.4 2232.5,698.74 2261.24,670 v1(2265,670) 2358.31,576.69 2373.31,576.69 v1(2470,480) ; 2772.4,707.93 2932.4,707.93 J1.7 2935.73,711.26 J1.5@2935.73,667.85 ; 2774.86,707.93 2774.86,780.14 J2.1 2940,865 2957.73,882.73 2957.73,1018.61 2935,1041.34 2935,1126 v1(2939,1130) ; J1.5 J1.5@2935.73,667.85 ; J1.8 J1.10 ; J1.11 J1.10 ; J1.5@2935.73,667.85 2937.4,666.18 3011.22,666.18 3021.06,676.02 J1.10
  L1 SIG w30: SW1.1 2845,2565 2922.48,2487.52 2922.48,2425.82 v1(2923.29,2425) ; v1@2922.48,2427.52 v1@2924.15,2425.85
  L1 SIG w50: U1.4@2879.17,231.65 3038.78,391.26 J1.8
  L4 SIG w15: v1(2435,155) 2435,445 v1(2470,480) ; v1(2923.29,2425) 2923.29,2415.53 2935.29,2403.53 2935.29,1133.71 v1(2939,1130)
  L4 SIG w25: v1(280,2630) 200,2550 v1(200,2400) 200,1500 340,1360 v1(500,1360) 850,1360 1030,1540 1270,1540 1315,1495 1315,1425 1340,1400 1535.36,1400 ; v1(1460,1580) 1550,1490 1550,1414.64 1535.36,1400 ; v1(2490,1005) 2265,780 v1(2265,670) 2200,670 2005,865 1915,865 1825,775 1825,615 1760,550 v1(1595,550) 1595,1340.36 1535.36,1400
  other v1: 200,1100 300,1100 200,1200 300,1200 700,1200 800,1200 1300,1200 1400,1200 200,1300 300,1300 700,1300 800,1300 1300,1300 1400,1300 2030,1320 1870,1400 2030,1520 1870,1570 295.68,1594.25 400,1600 500,1600 2030,1700 1880,1770 1500,2500 1500,2600 100,2800 200,2900 400,2900 300,3000 500,3000
IO1: IC1.39 J6.2 | length 2349.9
  L1 SIG w20: IC1.39 2872.09,1164.65 2885,1151.74 v1(2885,1090)
  L1 SIG w30: J6.2 2180.59,2794.82 2215,2760.41 v1(2215,2755)
  L4 SIG w20: v1(2215,2755) 2460,2510 2510,2510 2650,2370 2723.28,2370 2735,2358.28 2735,1804.06 2885,1654.06 v1(2885,1090)
IO2: IC1.38 J6.3 | length 2303.6
  L1 SIG w20: v1@2822.09,1132.91 IC1.38
  L1 SIG w30: J6.3 2042.8,2777.62 2060,2760.41 v1(2060,2755)
  L4 SIG w30: v1(2060,2755) 2400,2415 2540,2415 2685,2270 2685,1795 2825,1655 v1(2825,1130)
IO3: IC1.15 J6.4 | length 1844.5
  L1 SIG w15: J6.4 1905,2807.36 1924.45,2787.91 1927.62,2787.91 1955.53,2760 v1(1965,2760) ; v1(2100,1865) IC1.15
  L4 SIG w15: v1(1965,2760) 1965,2710 1820,2565 1765,2565 1543.5,2343.5 1543.5,2289.88 1555,2278.38 1555,2065 1755,1865 v1(2100,1865)
IO4: IC1.4 J6.5 | length 1664
  L1 SIG w15: J6.5 1851.45,2830.76 1851.45,2803.55 1950,2705 2315,2705 2365,2655 2430,2655 2485,2600 2486.21,2600 2495,2591.21 2495,2300 2610,2185 2610,2145 2680,2075 2705,2075 2772.09,2007.91 IC1.4
IO5: IC1.5 J6.6 | length 1705.5
  L1 SIG w15: J6.6 1629.41,2910.59 1710,2830 1760,2830 1920,2670 2285,2670 2350,2605 2400,2605 2445,2560 2445,2245 2711.87,1978.13 2711.87,1944.7 IC1.5
IO6: IC1.6 J6.7 | length 1793.6
  L1 SIG w15: J6.7 1601.61,2805 1740,2805 1910,2635 2270,2635 2335,2570 2390,2570 2415,2545 2415,2235 2672.09,1977.91 IC1.6
IO7: IC1.7 J6.8 | length 1910.7
  L1 SIG w15: J6.8 1357.93,2910.89 1357.93,2857.07 1375,2840 1520,2840 1590,2770 1725,2770 1890,2605 2255,2605 2325,2535 2371.21,2535 2380,2526.21 2380,2230 2620,1990 2620,1936.57 IC1.7
IO16: IC1.9 J6.9 | length 1936.8
  L1 SIG w15: J6.9 1336.02,2795 1530,2795 1590,2735 1710,2735 1875,2570 2240,2570 2305,2505 2335,2505 2350,2490 2350,2220 2522.09,2047.91 IC1.9
IO17: IC1.10 J6.10 | length 2049.9
  L1 SIG w15: J6.10 1078.23,2856.77 1100,2835 1265,2835 1330,2770 1515,2770 1590,2695 1690,2695 1845,2540 2235,2540 2315,2460 2315,2205 2472.09,2047.91 IC1.10
IO18: IC1.11 J6.11 | length 2104.3
  L1 SIG w15: J6.11 1050.43,2805 1260,2805 1310,2755 1310,2753.79 1318.79,2745 1505,2745 1580,2670 1675,2670 1830,2515 2210,2515 2290,2435 2290,2165 2422.09,2032.91 IC1.11
MCU_RX: IC1.36 J4.2 | length 1247.6
  L1 SIG w25: J4.2 2125.63,540.63 2269.37,540.63 v1(2270,540) ; IC1.36 2722.09,1156.6 2743.09,1135.6 2743.09,1031.91 2785.22,989.78 2785.22,939.78 v1(2790,935)
  L4 SIG w25: v1(2270,540) 2335,540 2565,770 2740,770 2805,835 2805,863.24 2794.78,873.45 2794.78,930.22 v1(2790,935)
MCU_TX: IC1.37 J4.3 | length 2053.7
  L1 SIG w25: v1(1926.23,791.42) 1926.23,688.81 J4.3@1987.5,627.54 ; J4.3@1987.5,627.5 1995,620 J4.3 ; IC1.37 2772.09,1087.91 2865,995 v1(2865,925)
  L4 SIG w25: v1(1926.23,791.42) 1875,740.19 1875,650 2026.5,498.5 2383.5,498.5 2615,730 2760,730 2865,835 v1(2865,925)
NC1: J5.2 K1.2 | length 959.5
  L4 SIG w50: J5.2 939.68,1980 K1.2
NC2: J7.2 K2.2 | length 1071.6
  L1 SIG w30: J7.2 1010,680 1060,730 1060,870 1110.32,920.32 K2.2
NetC3_1: C3.1 R2.1 SW1.2 | length 300.1
  L1 SIG w15: R2.1 2650.16,2265.16 2650.16,2564.84 SW1.2
NetC4_1: C4.1 IC1.3 R1.2 R2.2 | length 507.1
  L1 SIG w15: C4.1 2708,2200.32 2686.28,2222.04 2653.59,2222.04 R2.2 2650,2165 2685,2130 R1.2 2745.31,2099.69 2822.09,2022.91 IC1.3
  L1 SIG w30: IC1.3@2819.37,1937.2 IC1.3
NetD4_A: D4.A Q1.3 | length 142
  L1 SIG w10: Q1.3 1400,1880
  L1 SIG w15: 1400,1880 1400,1981.85 D4.A
NetD4_K: D4.K K1.4 | length 1104.1
  L1 SIG w15: D4.K 1410,2148.15 v1(1410,2255)
  L4 SIG w15: K1.4 857.56,1890 1100,1890 1140,1930 1140,2050 1350,2260 1405,2260 v1(1410,2255)
NetD5_2: D5.2 R4.1 | length 130.5
  L1 SIG w15: R4.1 D5.2
NetD6_A: D6.A Q2.3 | length 228.2
  L1 SIG w10: Q2.3 1660,778.28
  L1 SIG w15: 1660,778.28 1671.72,790
  L1 SIG w20: 1671.72,790 1760,790 1780,770 D6.A
NetD6_K: D6.K K2.4 | length 1308.4
  L1 SIG w20: K2.4 777.56,510 1210,510 1340,380 1768.28,380 1780,391.72 D6.K
NetD7_2: D7.2 R8.1 | length 111.1
  L1 SIG w20: R8.1 D7.2
NetIC1_27: IC1.27 J2.2 | length 632.3
  L1 SIG w25: IC1.27 2272.09,977.91 2385,865 J2.2
NetIC1_30: IC1.30 U2.2 | length 124.7
  L1 SIG w15: IC1.30 2420,1243.43 2420,1175 2434.25,1160.75 U2.2
NetIC1_31: IC1.31 U2.1 | length 123
  L1 SIG w15: U2.1 2465.75,1175.75 2475,1185 2475,1242.6 IC1.31
NetQ1_1: Q1.1 R5.2 | length 106.9
  L1 SIG w10: 1392.52,1787.48 Q1.1
  L1 SIG w15: 1360,1754.96 1392.52,1787.48
  L1 SIG w20: R5.2 1360,1754.96
NetQ1_2: Q1.2 R6.2 | length 127.8
  L1 SIG w10: Q1.2 1407.48,1795.85 1418.33,1785 1440,1785
  L1 SIG w15: 1440,1785 1460,1765 R6.2
NetQ2_1: Q2.1 R9.2 | length 327.5
  L1 SIG w10: R9.2 R9.2@1480,520.63 ; 1590,630 1652.52,692.52 Q2.1
  L1 SIG w20: R9.2@1480,520.63 1480,610 1500,630 1590,630
NetQ2_2: Q2.2 R10.2 | length 283.7
  L1 SIG w10: R10.2 1629.69,510 1639.69,520 ; 1664.96,635.04 1667.48,637.56 ; 1667.48,662.52 Q2.2
  L1 SIG w15: 1667.48,637.56 1667.48,662.52
  L1 SIG w20: 1639.69,520 1640,520.31 1640,610 1650,620 1650,620.08 1664.96,635.04
NetR3_2: R3.2 U3.1 | length 138.4
  L1 SIG w15: R3.2 R3.2@520.31,2590
  L1 SIG w25: R3.2@520.31,2590 570,2590 590,2610 U3.1
NetR4_2: R4.2 U3.2 | length 328
  L1 SIG w15: R4.2 530.63,2400.63 540,2410 540,2500 550,2510 U3.2
NetR5_1: R5.1 U3.3 | length 1525.3
  L1 SIG w20: v1(1360,1575) R5.1
  L1 SIG w25: U3.3 v1(1065,2510)
  L4 SIG w20: v1(1065,2510) 1170,2510 1355,2325 1475,2325 1500,2300 1500,1715 v1(1360,1575)
NetR7_2: R7.2 U4.1 | length 169.3
  L1 SIG w15: U4.1 U4.1@1540,1040
  L1 SIG w20: U4.1@1540,1040 1651.21,1040 1660,1031.21 R7.2
NetR8_2: R8.2 U4.2 | length 1024.9
  L1 SIG w10: R8.2 540,1060 560,1080 560,1100 570,1110 1400,1110 1430,1080 U4.2
NetR9_1: R9.1 U4.3 | length 214.1
  L1 SIG w20: U4.3 1430,719.43 1440,709.43 R9.1
NO1: J5.3 K1.3 | length 865.9
  L1 SIG w15: K1.3@707.24,2220 K1.3
  L1 SIG w40: J5.3 220,1942.2 220,2150 290,2220 K1.3@707.24,2220
NO2: J7.3 K2.3 | length 744.1
  L4 SIG w30: J7.3 502.2,542.2 560,600 560,890 590.32,920.32 K2.3
P3V3: C1.2 C2.2 IC1.2 J4.1 J6.1 R1.1 U1.3 U2.3 | length 12029.5
  L1 SIG w15: v1(1775,275) 1777.5,277.5 1777.5,322.5 v1(1895,440) 1904.47,440 1929.47,465 2042.52,465 J4.1 ; v1(2420,1005) 2420,1014.47 2434.25,1028.72 U2.3 ; v1(2440,60) 2445,55 2495,55 2559.45,119.45 U1.3 ; R1.1 C1.2 ; v1(2845,2285) 2845,2280 2800,2235 2800,2215 2815,2200 C2.2 2850.16,2199.84 2850.16,2130.16 C1.2 ; IC1.2 2872.09,2007.91 2850,2030 C1.2
  L1 SIG w30: J6.1 2318.39,2797.03 2345,2770.41 v1(2345,2765)
  L4 SIG w15: v1(1775,275) v1@1775.62,274.38 ; v1@1775.62,82.03 v1(1776.23,81.42) ; v1(1895,440) 1895,205 2000,100 2400,100 v1(2440,60) ; v1(2420,1005) 2466.71,1051.71 2508.29,1051.71 2560,1000 2841.98,1000 2881.98,1040 2940,1040 2976.29,1076.29 2976.29,1802.43 2975,1803.72 2975,2605 2845,2735
  L4 SIG w30: v1(1776.23,81.42) 788.58,81.42 570,300 200,300 100,400 100,2575 345,2820 2290,2820 v1(2345,2765) 2578.67,2765 2582.71,2769.04 2810.96,2769.04 2845,2735 v1(2845,2285)
  L4 SIG w40: v1@1775.62,82.03 v1@1775.62,274.38
RELAY1: IC1.28 R3.1 | length 3583.7
  L1 SIG w15: 540,2710 1040,2710 v1(1045,2705) ; IC1.28@2321.04,1244.47 IC1.28 2326.66,1240.94 2326.66,1030.99 v1(2331.23,1026.42)
  L1 SIG w25: R3.1 520,2690 540,2710
  L4 SIG w15: v1(1045,2705) 1195,2705 1524.5,2375.5 1524.5,2282.01 1530,2276.51 1530,1598.79 1533.79,1595 1540,1595 1630,1505 1630,1250 1715,1165 2393.95,1165 2402.73,1156.21 2402.73,1091.3 2337.85,1026.42 v1(2331.23,1026.42)
RELAY2: IC1.29 R7.1 | length 1033.7
  L1 SIG w15: R7.1 1660.62,959.7 1660.62,882.03 v1(1661.23,881.42) ; v1(2366.23,1106.42) 2369.16,1109.35 2369.16,1242.58 IC1.29
  L4 SIG w15: v1(1661.23,881.42) 1715,935.19 1715,960 1861.42,1106.42 v1(2366.23,1106.42)
TCK: IC1.35 J3.4 | length 1903.7
  L1 SIG w25: J3.4 1806.24,2386.24 1958.76,2386.24 v1(1960,2385) ; IC1.35 2672.09,1154.68 2690,1136.76 v1(2690,1130)
  L4 SIG w25: v1(1960,2385) 2075,2385 2385,2075 2385,1685 2690,1380 v1(2690,1130)
TDI: IC1.33 J3.2 | length 1878
  L1 SIG w25: J3.2 1807.5,2232.5 1957.5,2232.5 v1(1960,2235) ; IC1.33 2572.09,1149.08 2585,1136.17 v1(2585,1050)
  L4 SIG w25: v1(1960,2235) 2090,2235 2295,2030 2295,1640 2585,1350 v1(2585,1050)
TDO: IC1.34 J3.3 | length 2281.6
  L1 SIG w25: v1(1605,2305) 1606.87,2306.87 1723.13,2306.87 J3.3 ; IC1.34 2622.09,1105.38 2660,1067.47 v1(2660,1060.71)
  L4 SIG w25: v1(1605,2305) 2080,2305 2340,2045 2340,1665 2645,1360 2645,1116.31 2655.22,1106.09 2655.22,1065.49 v1(2660,1060.71)
TMS: IC1.32 J3.1 | length 1926.1
  L1 SIG w25: v1(1625,2090) 1629.78,2094.78 1629.78,2106.04 1675,2151.26 J3.1 ; IC1.32 2526.04,1241.56 2526.04,1118.96 v1(2530,1115)
  L4 SIG w25: v1(1625,2090) 2155,2090 2250,1995 2250,1615 2530,1335 v1(2530,1115)
VBUS: D1.K J1.1 K1.1 K2.1 U1.1 U3.4 U4.4 | length 5741.2
  L1 SIG w15: 2708.82,558.82 2769.06,558.82 2774.06,563.82 J1.1
  L1 SIG w25: U3.4 1060,2610 1120,2550 1120,2370 ; 2690,460 2690,540 2708.82,558.82
  L1 SIG w30: 1010,2260 1120,2370 ; 2125,190 2135,200 2162.53,200 2162.84,200.31 D1.K ; D1.K@2180.31,190 2320,190
  L1 SIG w50: 1010,2260 1010,2010 1180,1840 K1.1 v2(1180,1480) ; K2.1 v2(1180,190) 2125,190 ; 2320,190 2430.55,300.55 U1.1 2650.83,420.83 2680,450
  L4 SIG w50: v2(1180,190) 1174.26,195.74 1094.26,195.74 1020,270 1020,1270.71 1049.29,1300 1150.71,1300 1180,1329.29 v2(1180,1480) ; K2.1 1420,440 1530,550 U4.4
pads on no net: IC1.8 IC1.12 IC1.16 IC1.17 IC1.18 IC1.19 IC1.20 IC1.21 IC1.22 IC1.23 IC1.24 IC1.25 IC1.26 J1.4 SW1.SR

## Polygon pours and split planes (outlines as drawn)
P3V3 on L3 PW "P3V3_L03_P001" (solid, pour order 1): 0,3100 3100,3100 3100,0 0,0
GND on L2 GND "GND_L02_P000" (solid, pour order 0): 0,3100 3100,3100 3100,0 0,0

## Silkscreen, mask and mechanical layers (free items; w line width, h text height)
Top Overlay:
  text "GND" at 760,2810 h30
  text "IO18" at 895,2810 h30
  text "IO17" at 1035,2810 h30
  text "IO16" at 1175,2810 h30
  text "IO7" at 1340,2810 h30
  text "IO6" at 1450,2810 h30
  text "IO5" at 1595,2810 h30
  text "IO4" at 1720,2810 h30
  text "IO2" at 2010,2810 h30
  text "IO3" at 1870,2805 h30
  text "IO1" at 2155,2805 h30
  text "P3V3" at 2280,2805 h30
  text "JTAG" at 1710,1995 h60
  text "Boot" at 2540,715 h60
  text "UART" at 2010,310 h60
Mechanical 1:
  the board outline again, w10

## Text inside footprints (layer, text, board x,y; h text height)
SW1: Mechanical 13 "2" at 2616.66,2663.42 h31.5 r180; Mechanical 13 "1" at 2804.33,2663.42 h31.5 r180; Mechanical 13 "STRAIN RELIEF" at 2794.46,2821.68 h31.5 r180; Top Overlay "2" at 2616.66,2663.42 h31.5 r180; Top Overlay "1" at 2804.33,2663.42 h31.5 r180